# EAGLE board temp_sensor (EAGLE 6.4)
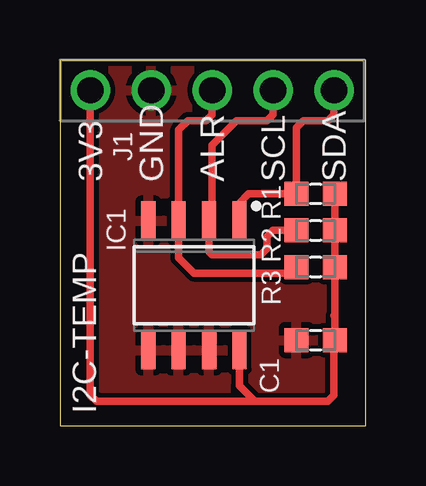
[diagram p0: board, top side]
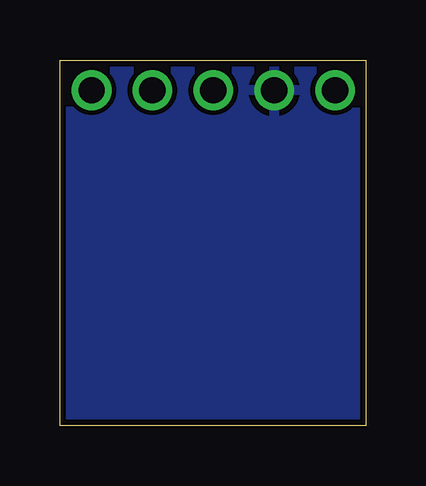
[diagram p1: board, bottom side, seen from below]

Size 12.75 x 15.23 mm. Coordinates in mm from the lower left corner, seen from the top.
Outline: 0,0 12.75,0 12.75,15.23 0,15.23 0,0
Copper layers (1*16): Top 0.035mm / dielectric 1.5mm / Bottom 0.035mm
Design rules "default *": minimum track width 8mil, minimum drill 12mil, track to track 8mil, track to pad 8mil, pad to pad 8mil, via to via 8mil, smd to smd 8mil, copper to edge 10mil, drill to drill 8mil, minimum pad ring 10mil, minimum via ring 8mil, stop-mask expansion 4mil, vias tented up to drill 0mil, thermal gap 10mil

## Footprints (pad centres in the part's own frame; a part is rotated, then mirrored left to right if it is on the bottom)
CAPC0603 = smd 1 x 1: 1 0.8,0; 2 -0.8,0
SOIC127P600X175-8N = smd 1.6 x 0.6: 1 -2.7,1.9; 2 -2.7,0.63; 3 -2.7,-0.64; 4 -2.7,-1.9; 5 2.7,-1.9; 6 2.7,-0.64; 7 2.7,0.64; 8 2.7,1.9
PHSP254P1270X254X1154-5S = drill 1.1: 1 0,0; 2 2.54,0; 3 5.08,0; 4 7.62,0; 5 10.16,0
RESC0603 = smd 1 x 1: P$1 0.8,0; P$2 -0.8,0

## Placement (x,y rotation side)
C1  0.1uF  [CAPC0603]  10.67,3.56 0 top
IC1  [SOIC127P600X175-8N]  5.59,5.84 270 top
J1  [PHSP254P1270X254X1154-5S]  1.27,13.97 0 top
R1  10k  [RESC0603]  10.67,9.65 180 top
R2  10k  [RESC0603]  10.67,8.13 180 top
R3  10k  [RESC0603]  10.67,6.6 180 top

## Library data of the parts
C1 = kemet-capacitors-ceramic; DATASHEET: http://www.kemet.com/kemet/web/homepage/kechome.nsf/weben/B79D94FAACCDEFCE852579F10063745E/$file/KEM_CC101_COMM_SMD.pdf; DESCRIPTION: Capacitores cerámicos de capas múltiples (MLCC) - SMD/SMT0603 25volts 0.1uF Y5V -20+80%; EAGLEUP: CAPC0603; M-PRICE: 0.1; MANUFACTURER: KEMET; MOUSER: 80-C0603C104Z3V; OCTOPART-LINK: http://octopart.com/c0603c104z3vactu-kemet-98662
IC1 = mchp-sensors; AVRG-PRICE: 1.17; DATASHEET: http://ww1.microchip.com/downloads/en/DeviceDoc/21909d.pdf; DESCRIPTION: 2 WIRE SERIAL TEMP SENSOR; DIGIKEY: MCP9801-M/SN-ND; MOUSER: 579-MCP9801-M/SN; NEWARK: 88H9948; OCTOPART-LINK: http://octopart.com/mcp9801-m%2Fsn-microchip-515928
J1 = wurth-pin-socket-headers
R1-R3 = te-fixed-resistors; AVRG-PRICE: 0.1; DATASHEET: http://www.te.com/commerce/DocumentDelivery/DDEController?Action=showdoc&DocId=Data+Sheet%7F1773204%7FH%7Fpdf%7FEnglish%7FENG_DS_1773204_H.pdf%7F1623095-1; DESCRIPTION: Resistores de película gruesa - SMD CRG0603 1% 10K 10KRL; EAGLEUP: RESC0603; MOUSER: 279-CRG0603F10K/10; OCTOPART-LINK: http://octopart.com/crg0603f10k10-tyco+electronics-16077289

## Nets
+3V3: C1.1 IC1.8 J1.1 R1.P$2 R2.P$2 R3.P$2
ALERT: IC1.3 J1.3 R3.P$1
GND: C1.2 IC1.4 IC1.5 IC1.6 IC1.7 J1.2
SCLK: IC1.2 J1.4 R2.P$1
SDA: IC1.1 J1.5 R1.P$1

## Tracks (layer width: path | path; a pad name or v marks a point on that pad's centre or on a via)
+3V3
  Top 0.305: R1.P$2 R2.P$2 R3.P$2 11.47,4.61 11.43,4.57 11.47,4.53 C1.1 11.43,3.52 11.43,1.27 11.18,1.02 8.13,1.02 | J1.1 1.27,1.27 1.52,1.02 8.13,1.02 | IC1.8 7.49,1.66 8.13,1.02
ALERT
  Top 0.305: R3.P$1 9.61,6.35 5.59,6.35 4.95,6.99 IC1.3 4.95,12.31 5.33,12.7 6.1,12.7 6.35,12.95 J1.3
GND
  pour Top: 0,15.24 12.7,15.24 12.7,0 0,0
  pour Bottom: 0,15.24 12.7,15.24 12.7,0 0,0
SCLK
  Top 0.305: R2.P$1 8.89,8.13 8.64,7.87 8.64,7.37 8.38,7.11 6.35,7.11 6.22,7.24 IC1.2 6.35,8.67 6.35,11.68 7.37,12.7 8.64,12.7 8.89,12.95 J1.4
SDA
  Top 0.305: J1.5 11.43,12.95 11.18,12.7 10.16,12.7 9.87,12.41 R1.P$1 7.87,9.65 7.49,9.27 IC1.1

## Text on the board
tPlace: 3V3 | GND | ALR | SCL | SDA | I2C-TEMP